# Altium PCB Aureo_PCB.PcbDoc
Units mil, origin at the board's own origin, x right, y up, seen from the top; angles counter-clockwise.
Board outline 6000 x 4000 mil, 2 copper layers (Top Layer, Bottom Layer); 17 components, 17 nets, 106 pads, 15 vias.
Unrouted connection lines stored in the file: 7.
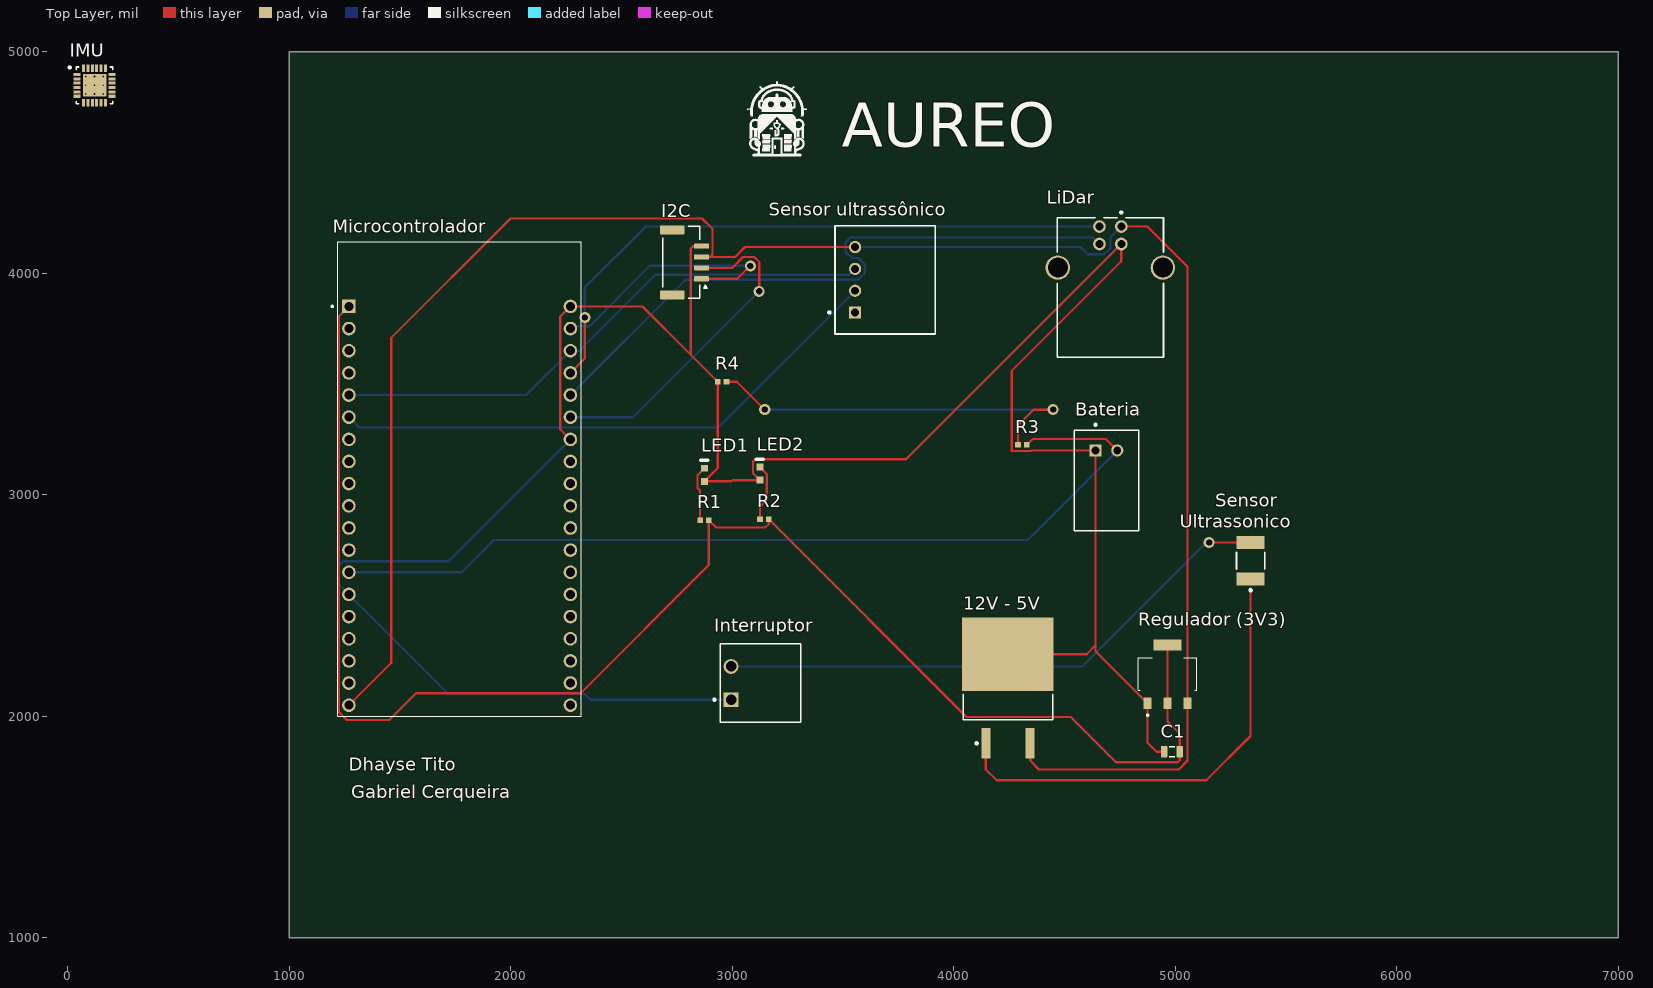
[diagram p0: Top Layer view]
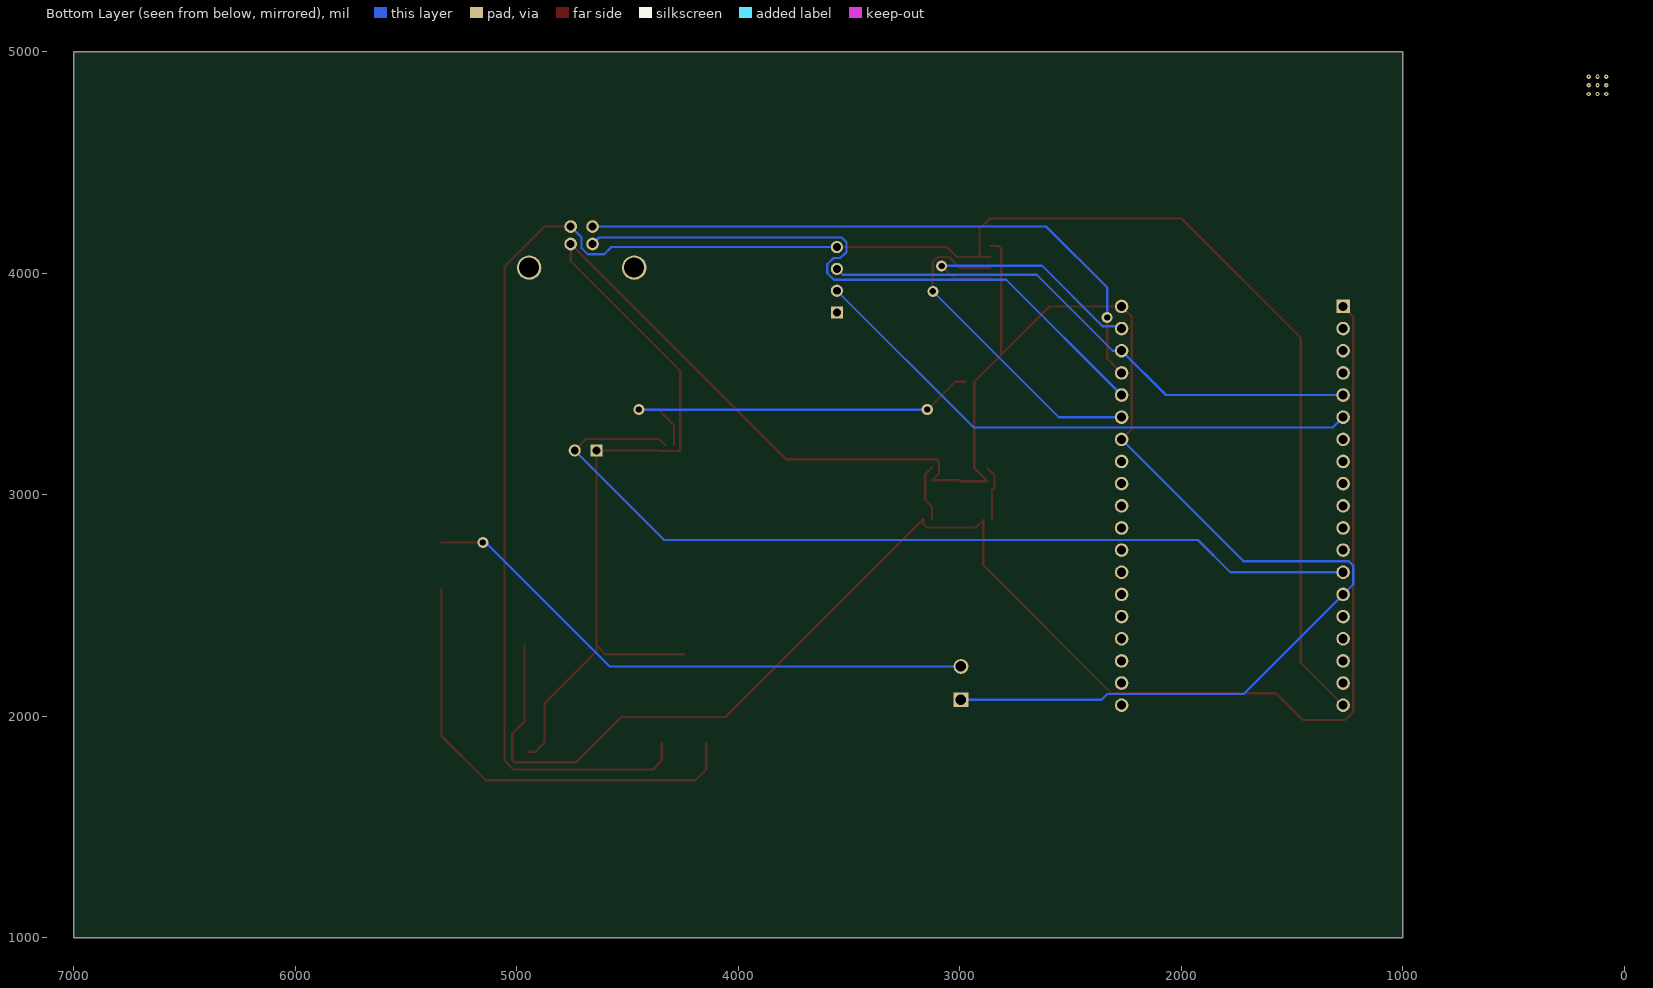
[diagram p1: Bottom Layer view, seen from below]
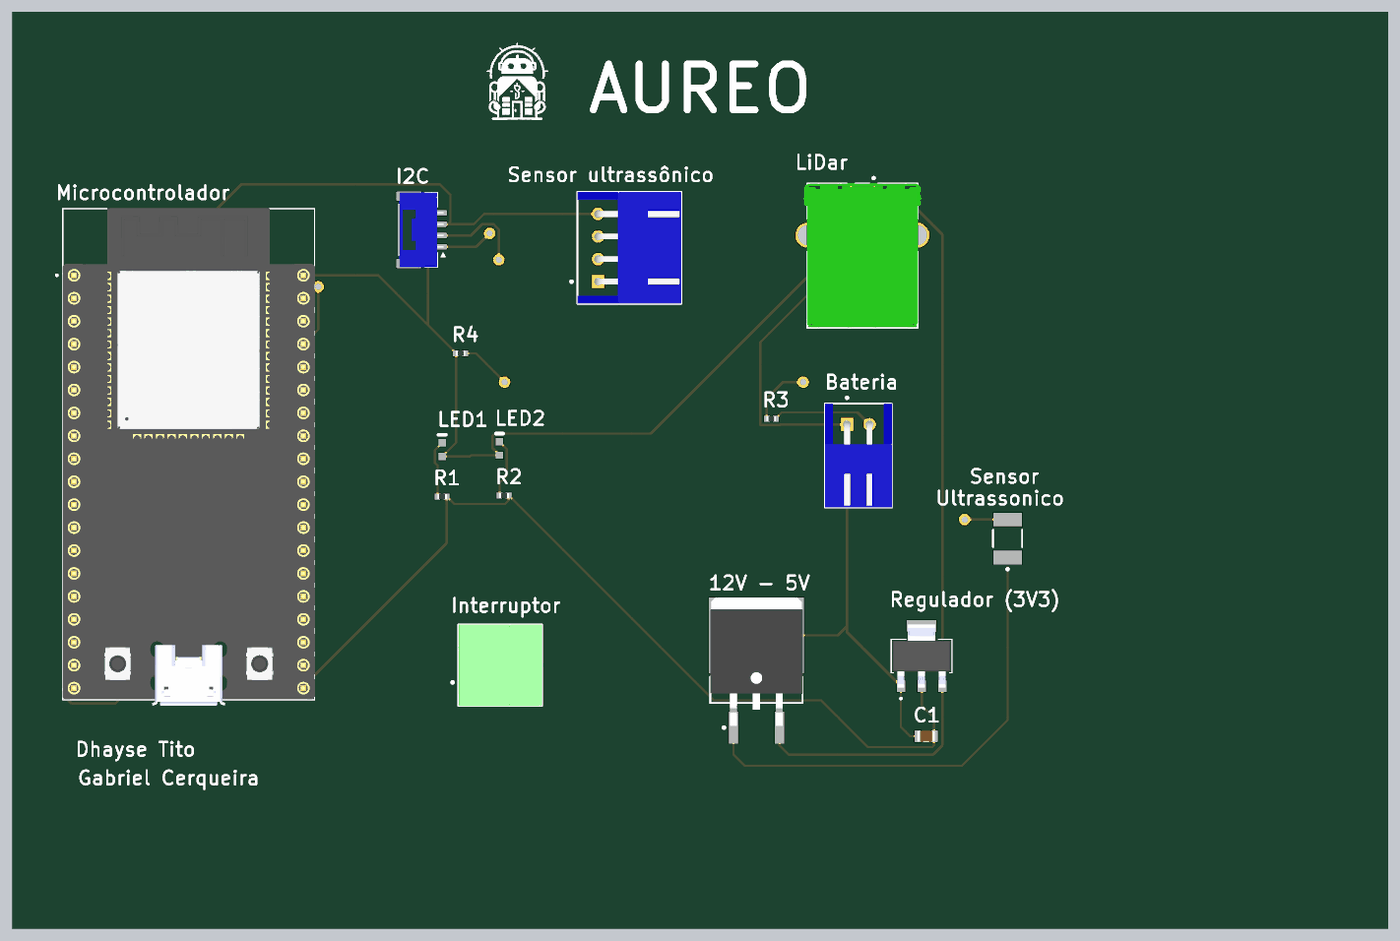
[diagram p2: 3D render of the assembled board from above, using the file's embedded part models]

## Layer stack, top to bottom
Top Solder: solder mask 0.4, Solder Resist, Dk 3.5
Top Layer: signal copper 1.4
Dielectric 1: dielectric 12.6, FR-4, Dk 4.8
Bottom Layer: signal copper 1.4
Bottom Solder: solder mask 0.4, Solder Resist, Dk 3.5

## Board outline
1000,1000 7000,1000 7000,5000 1000,5000

## Design rules (kind name [scope] priority, off if disabled: settings)
Clearance [All] p1: gap=10 ignorepadtopadclearanceinfootprint=FALSE except(0: Arc-Hole Track-Hole SMDPad-Hole THPad-Hole Via-Hole Fill-Hole Poly-Hole Region-Hole Text-Hole)
PolygonConnect [All] p1: connectstyle=Relief reliefconductorwidth=10 reliefentries=4 polygonreliefangle="90 Angle" airgapwidth=10
RoutingVias [All] p1: holewidth=28 width=50 viastyle="Through Hole" minholewidth=28 minwidth=50 maxholewidth=28 maxwidth=50
SolderMaskExpansion [All] p1: expansion=4 istentingtop=FALSE
Width [All] p1: maxlimit=10 minlimit=10 preferedwidth=10
30 further rules are at their usual default settings.

## Components (designator, comment, footprint, x,y, rotation, side; value= is the part's Value field where it differs from the comment)
"12V - 5V" "MC7805ACD2TG" ONSC-D2PAK-3-936-03_V 4245,2126.46 r90 top
Bateria "S2B-XH-A(LF)(SN)" JST-S2B-XH-A(LF)(SN)_V 4689.21,3200 r0 top
C1 "Capacitor 22µF +/-40% 16V 0805" CAPC0805(2012)145_L 4985,1840 r0 top value=22µF
I2C "BM04B-GHS-TBT" JST-BM04B-GHS-TBT_V 2795.94,4048.35 r90 top (schematic designator "Conversor serial I2C")
IMU "MPU6050" INSE-QFN-24_V 122.16,4847.76 r0 top
Interruptor "1803277" PHOE-1803277_V 2995,2150 r90 top
LED1 "LTST-C190KRKT" LTST-C191KRKT_V 2875,3090 r90 top
LED2 "HSMD-C190" AVAG-HSMX-C190_V 3125,3095 r90 top
LiDar "61729-1011BLF" FCI-61729-1011BLF_V 4707.01,4117.72 r0 top
Microcontrolador "ESP32-DEVKITC-32D" MODULE_ESP32-DEVKITC-32D 1770,3072.05 r0 top
R1 "Resistor 10k +/-1% 0402 100 mW" RESC1005X40X25ML05T05 2875,2885 r0 top value=10k
R2 "Resistor 10k +/-1% 0402 100 mW" RESC1005X40X25ML05T05 3145,2890 r0 top value=10k
R3 "Resistor 10k +/-1% 0402 100 mW" RESC1005X40X25ML05T05 4309.69,3225 r0 top value=100k
R4 "Resistor 10k +/-1% 0402 100 mW" RESC1005X40X25ML05T05 2955,3510 r0 top value=10k
"Regulador (3V3)" "AMS1117" SOT229P700X180-4N 4965,2190 r90 top
Sensor "MF-MSMF050-2" BOUR-MF-MSMF050-2_V 5340,2702.32 r90 top (schematic designator F?)
"Sensor ultrassônico" "S4B-XH-A(LF)(SN)" JST-S4B-XH-A(LF)(SN)_V 3555,3970 r90 top

## Footprints (in the part's own frame and the unit in brackets; to place one, negate y for a bottom-side part, rotate by r counter-clockwise, add the part's x,y. Pads: shape width x height; smd on the part's side, far side on the other; paste and mask are expansions set on the pad)
AVAG-HSMX-C190_V [mm] "SMD, 2-Leads, Body 1.6x0.8mm, Height 0.9mm"
  rect 0.8x0.8 smd: 1(-0.75,0) 2(0.75,0)
  silkscreen extent 1.65,-0.4 1.65,0.4, body extent -0.8,-0.4 0.8,0.4, height 0.9
BOUR-MF-MSMF050-2_V [mm] "SMD, 2-Leads, Body 4.55x3.24mm"
  rect 1.5x3.2 smd: 1(-2.1,0) 2(2.1,0)
  silkscreen extent -3.52,-1.62 0.95,1.62, body extent -2.27,-1.62 2.27,1.62, height 0.85
CAPC0805(2012)145_L [mm] "Chip Capacitor, Body 2.0x1.2mm, Height 1.45mm, IPC High Density"
  rrect25% 0.76x1.3 smd: 1(-0.9,0) 2(0.89,0)
  silkscreen extent -0.3,-0.55 0.3,0.55, body extent -1,-0.6 1,0.6, height 1.45
FCI-61729-1011BLF_V [mm] "THD, 4-Leads, Body 16x12.2mm"
  round 1.45 hole 0.92: 1(1.25,2.355) 2(-1.25,2.355) 3(-1.25,0.355) 4(1.25,0.355)
  round 2.8 hole 2.3: 5(6.02,-2.355) 6(-6.02,-2.355)
  silkscreen extent -6.1,-12.63 6.1,4.09, body extent -6.56,-12.58 6.56,3.37, height 11
INSE-QFN-24_V [mm] "QFN, 24-Leads, Body 4.00x4.00mm, Pitch 0.50mm, Thermal Pad 2.7x2.6mm"
  rect 0.8x0.35 smd: 1(-2,1.25) 2(-2,0.75) 3(-2,0.25) 4(-2,-0.25) 5(-2,-0.75) 6(-2,-1.25) 13(2,-1.25) 14(2,-0.75) 15(2,-0.25) 16(2,0.25) 17(2,0.75) 18(2,1.25)
  rect 0.35x0.85 smd: 7(-1.25,-1.975) 8(-0.75,-1.975) 9(-0.25,-1.975) 10(0.25,-1.975) 11(0.75,-1.975) 12(1.25,-1.975) 19(1.25,1.975) 20(0.75,1.975) 21(0.25,1.975) 22(-0.25,1.975) 23(-0.75,1.975) 24(-1.25,1.975)
  rect 2.7x2.6 smd: 25(0,0)
  silkscreen extent -2.97,-2.1 2.1,2.17, body extent -2,-2 2,2, height 0.95
JST-BM04B-GHS-TBT_V [mm] "Connector, 4-Leads, Body 8.25x4.25mm, Pitch 1.25mm"
  rrect30% 0.6x1.7 smd: 1(-1.875,-1.675) 2(-0.625,-1.675) 3(0.625,-1.675) 4(1.875,-1.675)
  rrect20% 1x2.8 smd: MP1(-3.725,1.675) MP2(3.725,1.675)
  silkscreen extent -4.13,-2.31 4.13,2.78, body extent -4.13,-2.18 4.12,2.77, height 4.21
JST-S2B-XH-A(LF)(SN)_V [mm] "Header, 2-Leads, Body 7.4x11.5mm, Pitch 2.5mm"
  rect 1.4x1.4 hole 0.9: 1(-1.25,0)
  round 1.4 hole 0.9: 2(1.25,0)
  silkscreen extent -3.7,-9.2 3.7,3.08, body extent -3.7,-9.2 3.7,2.3, height 5.95
JST-S4B-XH-A(LF)(SN)_V [mm] "Header, 4-Leads, Body 12.4x11.5mm, Pitch 2.5mm"
  rect 1.4x1.4 hole 0.9: 1(-3.75,0)
  round 1.4 hole 0.9: 2(-1.25,0) 3(1.25,0) 4(3.75,0)
  silkscreen extent -6.2,-9.2 6.2,3.07, body extent -6.2,-9.2 6.2,2.3, height 6.15
LTST-C191KRKT_V [mm] "SMD, 2-Leads, Body 1.6x0.8mm"
  rect 0.8x0.8 smd: 1(-0.75,0) 2(0.75,0)
  silkscreen extent 1.65,-0.4 1.65,0.4, body extent -0.8,-0.4 0.8,0.4, height 0.9
MODULE_ESP32-DEVKITC-32D [mm]
  rect 1.56x1.56 / inner round 1.56 / far side rect 1.56x1.56 hole 1.04: J2-1(-12.7,19.76)
  round 1.56 hole 1.04: J2-2(-12.7,17.22) J2-3(-12.7,14.68) J2-4(-12.7,12.14) J2-5(-12.7,9.6) J2-6(-12.7,7.06) J2-7(-12.7,4.52) J2-8(-12.7,1.98) J2-9(-12.7,-0.56) J2-10(-12.7,-3.1) J2-11(-12.7,-5.64) J2-12(-12.7,-8.18) J2-13(-12.7,-10.72) J2-14(-12.7,-13.26) J2-15(-12.7,-15.8) J2-16(-12.7,-18.34) J2-17(-12.7,-20.88) J2-18(-12.7,-23.42) J2-19(-12.7,-25.96) J3-1(12.7,19.76) J3-2(12.7,17.22) J3-3(12.7,14.68) J3-4(12.7,12.14) J3-5(12.7,9.6) J3-6(12.7,7.06) J3-7(12.7,4.52) J3-8(12.7,1.98) J3-9(12.7,-0.56) J3-10(12.7,-3.1) J3-11(12.7,-5.64) J3-12(12.7,-8.18) J3-13(12.7,-10.72) J3-14(12.7,-13.26) J3-15(12.7,-15.8) J3-16(12.7,-18.34) J3-17(12.7,-20.88) J3-18(12.7,-23.42) J3-19(12.7,-25.96)
  silkscreen extent -14.7,-27.25 13.95,27.15, body extent -13.97,-27.9 13.97,27.2, height 6.69
ONSC-D2PAK-3-936-03_V [mm] "DPAK, 3-Leads, Body 10.24x9.35mm, Pitch 2.54mm"
  rect 3.504x1.016 smd: 1(-6.313,2.54) 3(-6.313,-2.54)
  rect 8.38x10.49 smd: 4(3.9,0)
  silkscreen extent -6.44,-5.12 -0.69,5.12, body extent -6.11,-5.13 8.09,5.13, height 4.75
PHOE-1803277_V [mm] "CONN, Body 9.2x9.01mm, Pitch 3.81mm"
  rect 1.7x1.7 hole 1.2: 1(-1.905,0)
  round 1.7 hole 1.2: 2(1.905,0)
  silkscreen extent -4.5,-8 4.5,2.02, body extent -4.51,-8 4.5,1.3, height 7.25
RESC1005X40X25ML05T05 [mm] "Chip Resistor, 2-Leads, Body 1.05x0.55mm, IPC Low Density"
  rect 0.65x0.65 smd: 1(-0.5,0) 2(0.5,0)
  body extent -0.53,-0.28 0.53,0.28, height 0.4
SOT229P700X180-4N [mm]
  rrect15% 1.31x0.93 smd: 1(-3.345,2.29) 2(-3.345,0) 3(-3.345,-2.29)
  rrect15% 1.31x3.24 smd: 4(3.345,0)
  silkscreen extent -4.8,-3.36 1.86,3.36, body extent -3.5,-3.25 3.5,3.25, height 1.8

## Part data
"12V - 5V": library part CMP-019-00027-3, "Positive Voltage Regulator, 5 V Output Voltage, 1 A, 0 to 125 degC, 3-Pin D2PAK (936-03), Pb-Free, Tube", Case/Package=TO-263-3, Dropout Voltage=2V, Manufacturer="ON Semiconductor", Max Input Voltage=35V, Max Operating Temperature=125°C, Max Ouput Current=1A, Min Input Voltage=7V, Min Operating Temperature=0°C, Nominal Output Voltage=5V, Package Description="3-Pin Flange Mount, Body 10.02 x 9.1945 mm, Pitch 2.54 mm", Package Quantity=50, Package Reference=D2PAK-3-936-03, Package Version="Rev. E, 09/2015", Datasheet URL=http://www.onsemi.com/pub_link/Collateral/MC7800-D.PDF, Datasheet Version="Rev. 27, 11/2014", Manufacturer URL=http://www.onsemi.com/, Mounting Technology=SM, Output Current=1A, Output Voltage=5V, Outputs=1, Package URL=http://www.onsemi.com/pub_link/Collateral/936-03.PDF, Packaging=Rail/Tube, Pins=3, RoHS Compliant=True
Bateria: library part CMP-002-00032-2, "Male Header, Pitch 2.5 mm, 1 x 2 Position, Height 6.1 mm, Tail Length 3.4 mm, -25 to 85 degC, RoHS, Bulk", Manufacturer=JST, Max Operating Temperature=85°C, Min Operating Temperature=-25°C, Package Description="XH Series Disconnectable Crimp Style Connector, Pitch 2.5 mm, 1 x 2 Position, Height 6.1 mm, Tail Length 3.4 mm", Case/Package=S2B-XH-A(LF)(SN), Connector Type=Header, Datasheet URL=http://www.jst-mfg.com/product/pdf/eng/eXH.pdf, Datasheet Version=May-16, Gender=Male, Manufacturer URL=http://www.jst.com/home2.html, Mounting Technology=TH, Package Reference=S2B-XH-A(LF)(SN), RoHS Compliant=Unknown
C1: library part CMP-001-00081-4, "Chip Capacitor, 22µF +/-40%, 16V, 0805, Thickness 1.45 mm", Case/Package=0805, Max Operating Temperature=85°C, Min Operating Temperature=-55°C, Tolerance=5%, Voltage Rating=16V, Mounting Technology=SMT, Pins=2
I2C: library part CMP-002-00053-3, "Header, Pitch 1.25 mm, 1 x 4 Position, Height 4.05 mm, -25 to 85 degC", Pins=6
IMU: library part CMP-010-00014-3, "3-Axis Gyroscope, 3-Axis Accelerometer, 2.375 to 3.46 V, -40 to 105 degC, 24-Pin QFN, RoHS, Tape and Reel", Case/Package=QFN, Manufacturer=InvenSense, Max Operating Temperature=85°C, Max Supply Voltage=3.6V, Min Operating Temperature=-40°C, Min Supply Voltage=2.5V, Package Description="24-Pin Quad Flat No-lead Package, Body 4 x 4 mm, Pitch 0.5 mm", Package Quantity=5000, Package Reference=QFN-24, Datasheet URL=https://datasheet.ciiva.com/1513/1788002-1513632.pdf, Datasheet Version="Rev. 3.4, 08/2013", Interface=I2C, Mounting Technology=SM, Packaging=CutTape, Pins=24, RoHS Compliant=True, Sensor Type=Motion
Interruptor: library part CMP-002-00014-2, "Male Header, Pitch 3.81 mm, 1 x 2 Position, Height 7.25 mm, Tail Length 3.4 mm, RoHS, Bulk", Colour=Green, Current Rating=8A, Manufacturer="Phoenix Contact", Package Description="Male Header, Pitch 3.81 mm, 1 x 2 Position, Height 7.25 mm, Tail Length 3.4 mm", Package Quantity=50, Voltage Rating=160V, Case/Package=1803277, Connector Type=Header, Contact Plating=Tin, Datasheet URL=https://datasheet.ciiva.com/16096/1803277-16096845.pdf, Datasheet Version=Feb-14, Diameter=7.25mm, Gender=Male, Lead Pitch=0.15inch, Manufacturer URL=http://www.phoenixcontact.com/, Max Current Rating=8A, Mounting Technology=TH, Package Reference=1803277, Packaging=Bulk, Pins=2, RoHS Compliant=True, Rows=1
LED1: library part CMP-007-00024-2, "LED Uni-Color Red, 62.5 mW, 25 mA, -30 to 85 degC, 2-Pin SMD, RoHS, Tape and Reel", Case/Package=0603, Colour=Red, Forward Current=20mA, Forward Voltage=2V, Manufacturer=Lite-On, Max Operating Temperature=85°C, Min Operating Temperature=-55°C, Package Description="2-Pin Surface Mount Device, Body 1.6 x 0.8 mm", Package Quantity=3000, Package Reference=C191KRKT, Power=75mW, Datasheet URL=http://optoelectronics.liteon.com/upload/download/DS-22-99-0151/S_110_LTST-C190KRKT.pdf, Datasheet Version="Rev. F, 05/2013", Illumination Colour=Red, Lens Style=Diffused, Luminous Intensity=54mcd, Manufacturer URL=http://www.us.liteon.com/, Mounting Technology=SM, Nominal Vf=2V, Packaging=TapeandReel, Pins=2, RoHS Compliant=True, Viewing Angle=130degrees
LED2: library part CMP-007-00012-2, "LED Uni-Color Orange, 52 mW, 20 mA, -40 to 85 degC, 2-Pin SMD, RoHS, Tape and Reel", Case/Package=0603, Colour=Orange, Forward Current=20mA, Forward Voltage=2.2V, Manufacturer=Avago, Max Operating Temperature=85°C, Min Operating Temperature=-40°C, Package Description="2-Pin Surface Mount Device, Body 1.6 x 0.8 mm, Height 0.9 mm", Package Quantity=4000, Package Reference=HSMX-C190, Power=52mW, Datasheet URL=http://docs.avagotech.com/docs/AV02-0551EN, Datasheet Version=Mar-12, Illumination Colour=Orange, Lens Style=Diffused, Luminous Intensity=8mcd, Manufacturer URL=http://www.avagotech.com/, Mounting Technology=SM, Nominal Vf=2.2V, Packaging=TapeandReel, Pins=2, RoHS Compliant=True, Viewing Angle=170degrees
LiDar: library part CMP-002-00041-2, "USB Receptacle B Type, Right Angle, 4 Position, Height 11.5 mm,-40 to 85 degC, RoHS, Tube", Colour=Black, Current Rating=1.5A, Manufacturer="FCI Electronics", Max Operating Temperature=40°C, Min Operating Temperature=0°C, Package Description="4-Pin Through Hole Device, Body 16 x 12.2 mm", Package Quantity=44, Case/Package=61729-1011BLF, Connector Type=USB, Contact Material=Copper, Contact Plating=Nickel, Datasheet URL=http://portal.fciconnect.com/Comergent/fci/drawing/61729.pdf, Datasheet Version="Rev. W, 05/2014", Gender=Female, Lead Pitch=2.5mm, Manufacturer URL=http://portal.fciconnect.com/, Mounting Technology=TH, Package Reference=61729-1011BLF, Packaging=Rail/Tube, Pins=4, RoHS Compliant=True
Microcontrolador: "WiFi Development Tools (802.11) ESP32 General Development Kit, ESP32-WROOM-32D on the board", Package=None, Check_prices=https://www.snapeda.com/parts/ESP32-DEVKITC-32D/Espressif+Systems/view-part/?ref=eda, MF="Espressif Systems", MP=ESP32-DEVKITC-32D, SnapEDA_Link=https://www.snapeda.com/parts/ESP32-DEVKITC-32D/Espressif+Systems/view-part/?ref=snap
R1 R2 R3 R4: library part CMP-009-00015-5, "Chip Resistor, 10 KOhm, +/- 1%, 0.1 W, -55 to 155 degC, 0402 (1005 Metric)", Case/Package=0402, Max Operating Temperature=155°C, Min Operating Temperature=-55°C, Power=100mW, Tolerance=1%, Voltage Rating=50V, Mounting Technology=SM, Pins=2, RoHS Compliant=True
"Regulador (3V3)": "1A LOW DROPOUT VOLTAGE REGULATOR SOT-223", Package="SOT-223 Seeed Technology", Availability="Not in stock", Check_prices=https://www.snapeda.com/parts/AMS1117/Advanced+Monolithic+Systems/view-part/?ref=eda, MF="Advanced Monolithic Systems", MP=AMS1117, Price=None, SnapEDA_Link=https://www.snapeda.com/parts/AMS1117/Advanced+Monolithic+Systems/view-part/?ref=snap
Sensor: library part CMP-005-00001-4, "PTC Resettable Fuse, 15 V, 500 mA, -40 to 85 degC, 2-Pin SMD, RoHS, Tape and Reel", Case/Package=1812, Current Rating=100A, Manufacturer=Bourns, Max Operating Temperature=85°C, Min Operating Temperature=-40°C, Nominal Supply Voltage=15V, Package Description="2-Pin Surface Mount Device, Body 4.55 x 3.24 mm", Package Quantity=2000, Resistance=150mohm, Datasheet URL=http://www.bourns.com/docs/Product-Datasheets/mfmsmf.pdf, Datasheet Version="Rev. AG, 08/2016", Lead Pitch=4.73mm, Mounting Technology=SM, Package Reference=MF-MSMF050-2, Packaging=TapeandReel, RoHS Compliant=True, Voltage Rating=15V
"Sensor ultrassônico": library part CMP-002-00034-2, "Male Header, Pitch 2.5 mm, 1 x 4 Position, Height 6.1 mm, Tail Length 3.4 mm, -25 to 85 degC, RoHS, Bulk", Manufacturer=JST, Max Operating Temperature=85°C, Min Operating Temperature=-25°C, Package Description="XH Series Disconnectable Crimp Style Connector, Pitch 2.5 mm, 1 x 4 Position, Height 6.1 mm, Tail Length 3.4 mm", Case/Package=S4B-XH-A(LF)(SN), Connector Type=Header, Datasheet URL=http://www.jst-mfg.com/product/pdf/eng/eXH.pdf, Datasheet Version=May-16, Gender=Male, Manufacturer URL=http://www.jst.com/home2.html, Mounting Technology=TH, Package Reference=S4B-XH-A(LF)(SN), RoHS Compliant=Unknown

## Via types
v1: diameter 19.68, hole 7.87, Top Layer to Bottom Layer, 9 vias
v2: diameter 50, hole 28, Top Layer to Bottom Layer, 6 vias

## Nets (pads, with @x,y where several pads share a name; then routed paths per layer and width w, separated by ;. In a path a pad name is that pad's centre, name@x,y a point inside that pad or via, vN(x,y) a via of type N, cw(c..) or ccw(c..) an arc to the next point about the centre after c; other vN are vias at no path point)
12V: Bateria.2 Microcontrolador.J2-13 R3.2 | length 4138
  Top Layer w10: R3.2 4356.36,3251.99 4686.44,3251.99 Bateria.2
  Bottom Layer w10: Microcontrolador.J2-13 1779,2650 1925,2796 4334.43,2796 Bateria.2
+3V3: "Regulador (3V3).2" "Regulador (3V3).4" C1.2 Microcontrolador.J2-1 R1.2 R2.2 | length 7195.8
  Top Layer w10: Microcontrolador.J2-1 1224,3804 1224,2019 1260,1983 1452,1983 1573,2104 2316,2104 2894.69,2682.69 R1.2 2927,2852.69 3150,2852.69 3164.69,2867.37 R2.2 4057.69,1997 4528,1997 4732,1793 5011.04,1793 5020.04,1802 C1.2 5020.04,1921 4965,1976.04 4965,2058.31 4965,2321.69
+5V: "12V - 5V.3" "Regulador (3V3).3" "Sensor ultrassônico.4" I2C.3 IMU.13 LiDar.1 Microcontrolador.J2-19 | length 8992.8
  Top Layer w10: Microcontrolador.J2-19 1461,2241 1461,3708 2000,4247 2864,4247 2911,4200 2911,4083.95 2900,4072.95 ; I2C.3 2900,4072.95 ; 3555,4117.64 3058.3,4117.64 3013.62,4072.95 2900,4072.95 ; 4345,1877.91 4345,1800 4385,1760 5015.16,1760 5055.16,1800 5055.16,2058.31 5055.16,4028.84 4873.57,4210.43 LiDar.1
  Bottom Layer w10: 3555,4117.64 4572.36,4117.64 4605,4085 4680,4085 4707,4112 4707,4161.21 LiDar.1
+12V: "12V - 5V.1" Sensor.1 | length 2083.1
  Top Layer w10: 4145,1877.91 4145,1760 4194,1711 5140,1711 5340,1911 5340,2578.06
D32: IMU.12 Microcontrolador.J2-7
D33: IMU.10 Microcontrolador.J2-8
D34: "Sensor ultrassônico.3" Microcontrolador.J2-5 Microcontrolador.J3-3 | length 2520.8
  Bottom Layer w10: Microcontrolador.J2-5 2070,3450 Microcontrolador.J3-3 2309.54,3650 2652.54,3993 3528.79,3993 3555,4019.21
D35: "Sensor ultrassônico.2" Microcontrolador.J2-6 | length 2560.4
  Bottom Layer w10: Microcontrolador.J2-6 1317,3303 2937.21,3303 3555,3920.79
GND: "12V - 5V.4" "Regulador (3V3).1" Bateria.1 C1.1 I2C.4 IMU.18 Interruptor.1 LED1.1 LED2.1 LiDar.4 Microcontrolador.J2-14 Microcontrolador.J3-1 Microcontrolador.J3-7 R4.1 | length 11660.4
  Top Layer w10: Microcontrolador.J3-7 2224,3296 2224,3804 Microcontrolador.J3-1 2595.32,3850 2813,3632.32 ; I2C.4 2825.17,4122.17 2813,4110 2813,3632.32 ; 4245,2280 4600,2280 4640,2320 ; C1.1 4914.84,1840 4874.84,1880 4874.84,2058.31 4640,2293.15 4640,2320 ; 2813,3632.32 R4.1 2935.32,3120.79 LED1.1 2997,3060.47 3002,3065.48 LED2.1 3094,3096.47 3094,3150 3104,3160 3784.53,3160 LiDar.4 4756.22,4053.22 4262,3559 4262,3197 4348,3197 4351,3200 Bateria.1 4640,2320
  Bottom Layer w10: Microcontrolador.J3-7 1720,2700 1244,2700 1224,2680 1224,2596 Microcontrolador.J2-14 1720,2100 2336,2100 2361,2075 Interruptor.1
NetF?_2: Interruptor.2 Sensor.2 | length 2584.2
  Top Layer w10: v2(5153,2785) Sensor.2
  Bottom Layer w10: Interruptor.2 4580,2225 5128.22,2773.22 5130.39,2773.22 5153.38,2796.2 v2@5153.38,2798.38
NetLED1_2: LED1.2 R1.1 | length 252.1
  Top Layer w10: R1.1 2855.32,3018.68 2844,3030 2844,3088.53 LED1.2
NetLED2_2: LED2.2 R2.1 | length 260.1
  Top Layer w10: LED2.2 3156,3093.53 3156,2976 3125.32,2945.32 R2.1
NivelBat: R3.1 R4.2 | length 1803.5
  Top Layer w10: R4.2 3021,3510 v2(3147,3384) ; R3.1 4290,3314 4360,3384 v2(4449,3384)
  Bottom Layer w10: v2(3147,3384) v2(4449,3384)
RX: LiDar.3 Microcontrolador.J3-5 | length 2915.6
  Bottom Layer w10: Microcontrolador.J3-5 2790,3970 3568,3970 3598,4000 3598,4040 3570,4068 3540,4068 3512,4096 3512,4140 3533,4161 4628.49,4161 LiDar.3
SCL: I2C.1 IMU.23 Microcontrolador.J3-2 | length 1173.6
  Top Layer w10: I2C.1 3023.53,3974.53 v2(3082,4033)
  Bottom Layer w10: Microcontrolador.J3-2 2280,3760 2355.71,3760 2628.71,4033 v2(3082,4033)
SDA: I2C.2 IMU.24 Microcontrolador.J3-6 | length 1509.9
  Top Layer w10: I2C.2 3000,4023.74 3049.26,4073 3100,4073 3122,4051 v2(3122,3918)
  Bottom Layer w10: Microcontrolador.J3-6 2554,3350 v2(3122,3918)
TX: LiDar.2 Microcontrolador.J3-4 | length 2849.6
  Top Layer w10: Microcontrolador.J3-4 2335,3615 v2(2335,3800)
  Bottom Layer w10: v2(2335,3800) 2335,3935 2611,4211 4657.8,4211 LiDar.2
pads on no net: "Sensor ultrassônico.1" I2C.MP1 I2C.MP2 IMU.1 IMU.2 IMU.3 IMU.4 IMU.5 IMU.6 IMU.7 IMU.8 IMU.9 IMU.11 IMU.14 IMU.15 IMU.16 IMU.17 IMU.19 IMU.20 IMU.21 IMU.22 IMU.25 LiDar.5 LiDar.6 Microcontrolador.J2-2 Microcontrolador.J2-3 Microcontrolador.J2-4 Microcontrolador.J2-9 Microcontrolador.J2-10 Microcontrolador.J2-11 Microcontrolador.J2-12 Microcontrolador.J2-15 Microcontrolador.J2-16 Microcontrolador.J2-17 Microcontrolador.J2-18 Microcontrolador.J3-8 Microcontrolador.J3-9 Microcontrolador.J3-10 Microcontrolador.J3-11 Microcontrolador.J3-12 Microcontrolador.J3-13 Microcontrolador.J3-14 Microcontrolador.J3-15 Microcontrolador.J3-16 Microcontrolador.J3-17 Microcontrolador.J3-18 Microcontrolador.J3-19
copper on no net:
  other v1: 82.79,4808.39 122.16,4808.39 161.53,4808.39 82.79,4847.76 122.16,4847.76 161.53,4847.76 82.79,4887.13 122.16,4887.13 161.53,4887.13

## Silkscreen, mask and mechanical layers (free items; w line width, h text height)
Top Overlay:
  drawing of 14 lines, arcs and shapes, not listed
  text "AUREO" at 3495,4570 h200
  text "Ultrassonico" at 5020,2850 h60
  text "Dhayse Tito" at 1270,1755 h60
  text "Gabriel Cerqueira" at 1280,1630 h60